# Allegro board temperature.brd
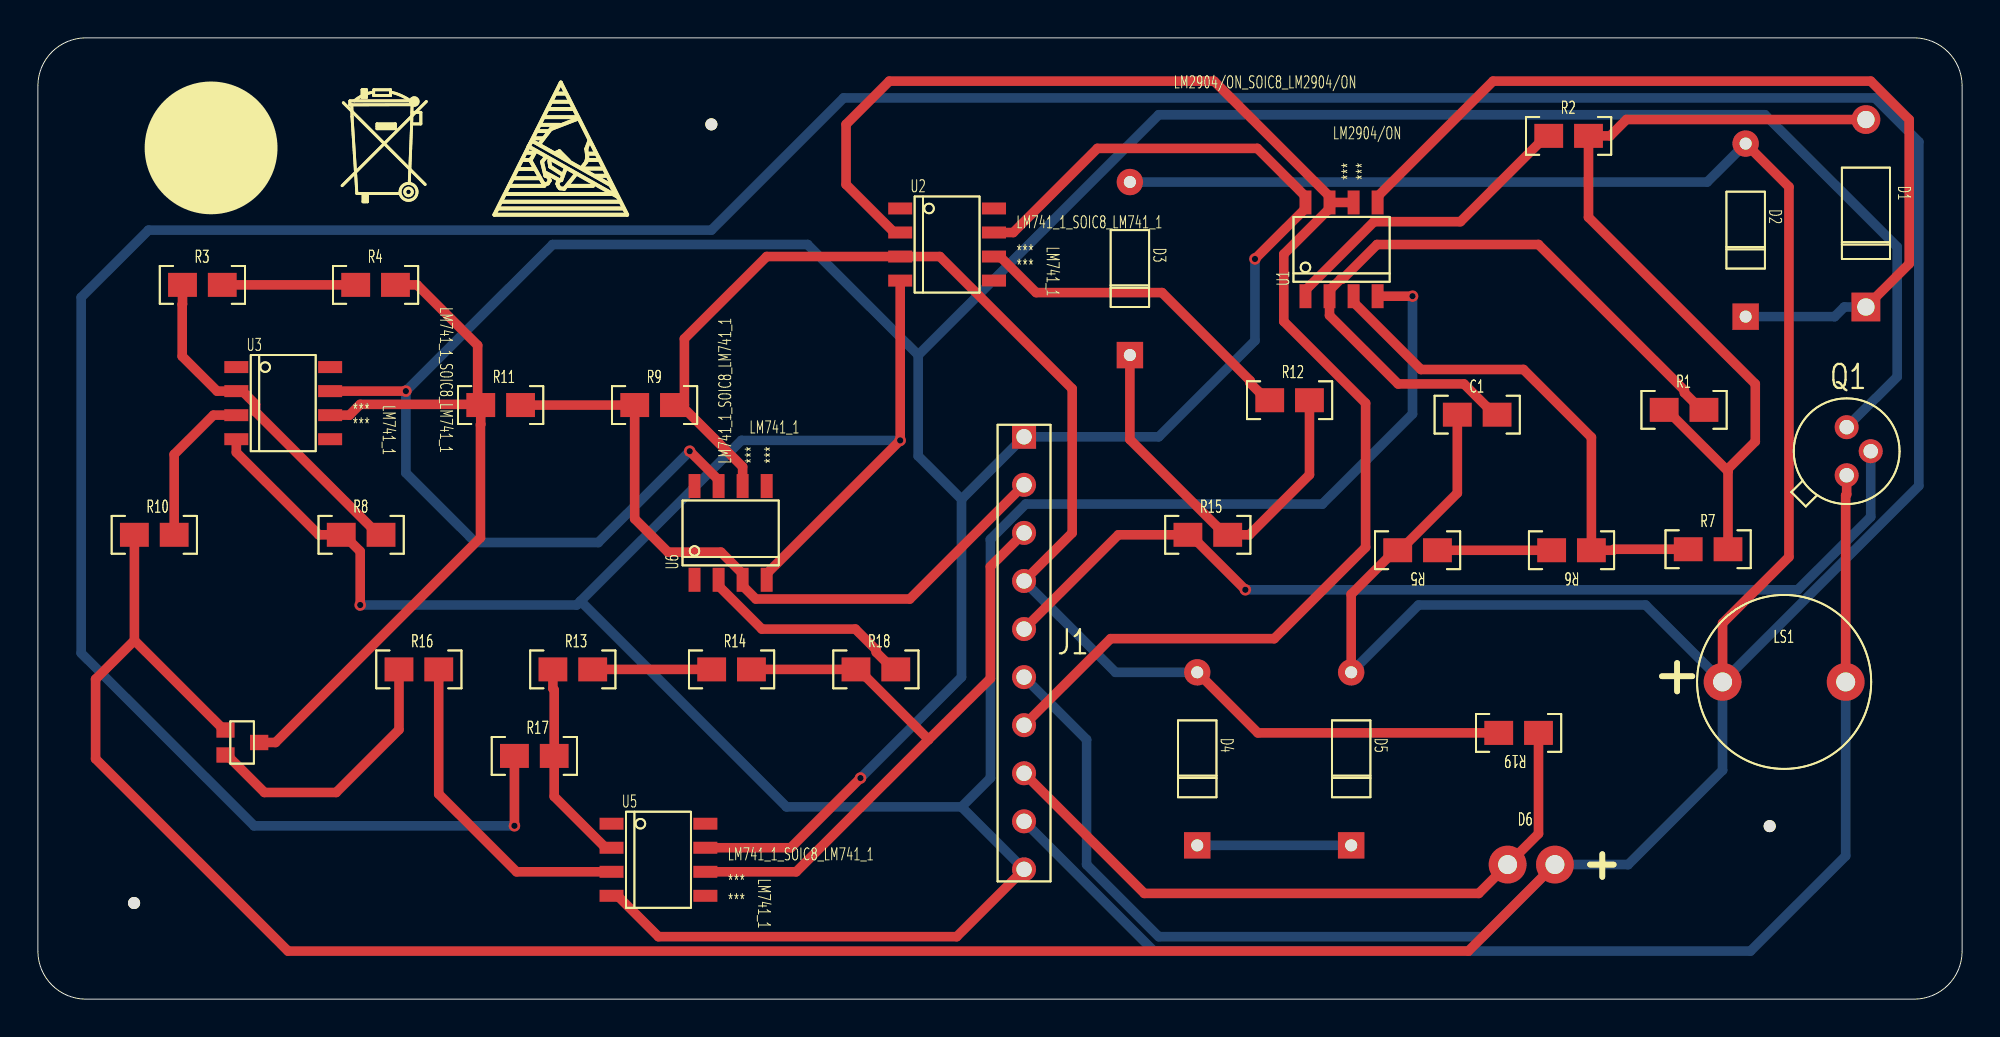
[diagram p0: board, top side]
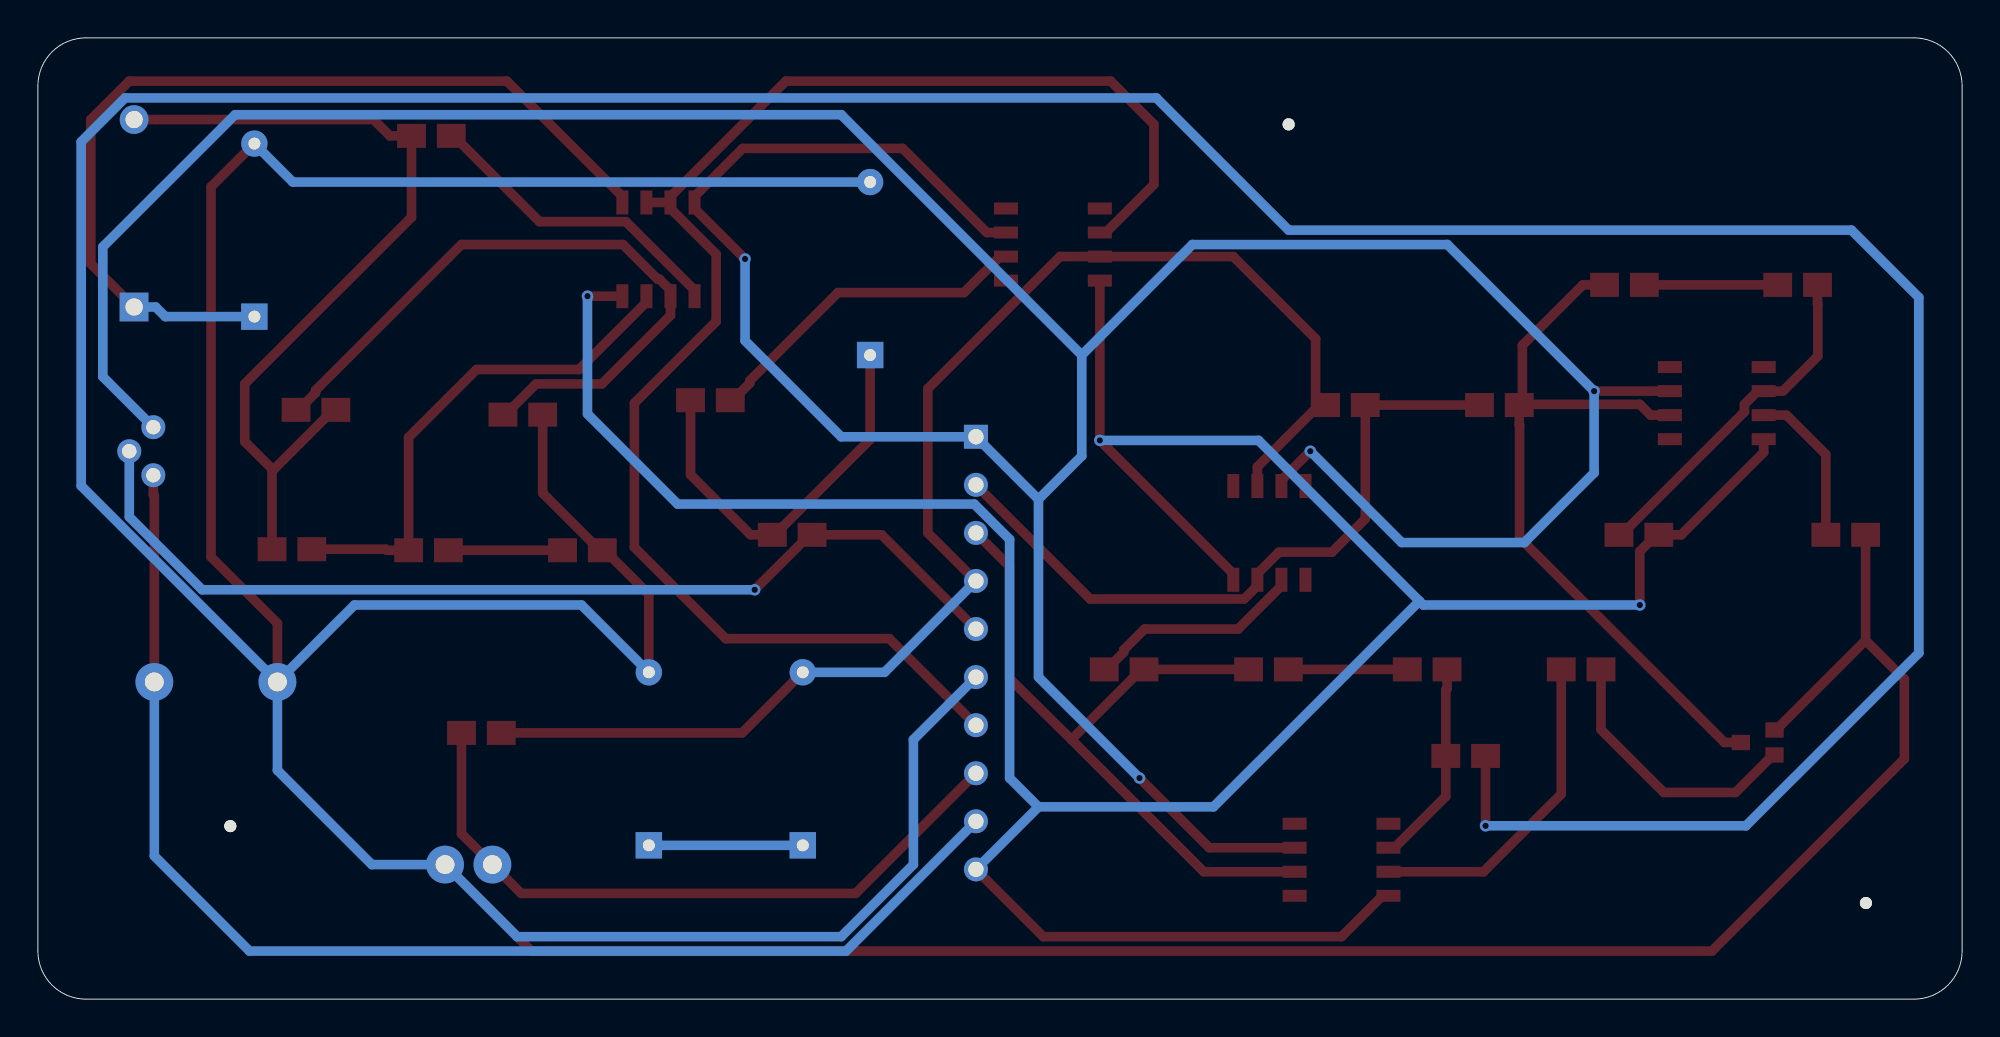
[diagram p1: board, bottom side, seen from below]

Outline 101.6 x 50.8 mm; copper layers: TOP, BOTTOM. Coordinates in mm from the lower left corner of the outline.
Outline path: 0,48.26 arc(0.74,50.06) 2.54,50.8 99.06,50.8 arc(100.86,50.06) 101.6,48.26 101.6,2.54 arc(100.86,0.74) 99.06,0 2.54,0 arc(0.74,0.74) 0,2.54 0,48.26

## Placement (name value [footprint] x y rotation side)
C1  0.1u  [0805]  75.95 30.99 0 top
D1  D1N5819/ON  [DO41-1]  96.52 36.58 0 top
D2  1n5231/ON  [DO35-1]  90.17 36.07 0 top
D3  1N4099  [DO35-1]  57.66 34.04 0 top
D4  1N4617  [DO35-1]  61.21 8.13 0 top
D5  1N4617  [DO35-1]  69.34 8.13 0 top
D6  LP_A676-TYP  [FG]  79.5 7.11 0 top
J1  HEADER 10  [SIP]  52.07 29.72 0 top
LS1  BUZZER  [FMQ]  92.2 16.76 0 top
NOREF  -  []  26.92 44.45 0 top
NOREF#2  -  [unnamed#2]  35.56 46.23 0 top
NOREF#3  -  [unnamed#2]  5.08 5.08 0 top
NOREF#4  -  []  9.65 45.21 0 top
NOREF#5  -  []  20.83 45.21 0 top
NOREF#6  -  [unnamed#2]  91.44 9.14 0 top
Q1  2N2222A  [TO18]  95.5 27.69 0 top
R1  4.7k  [0805]  86.87 31.24 0 top
R2  330  [0805]  80.77 45.72 0 top
R3  33k  [0805]  8.64 37.85 0 top
R4  2.4k  [0805]  17.78 37.85 0 top
R5  130k  [0805]  72.9 23.62 180 top
R6  9.1k  [0805]  81.03 23.62 180 top
R7  100k  [0805]  88.14 23.88 0 top
R8  100k  [0805]  17.02 24.64 0 top
R9  56k  [0805]  32.51 31.5 0 top
R10  100k  [0805]  6.1 24.64 0 top
R11  390  [0805]  24.38 31.5 0 top
R12  1.8k  [0805]  66.04 31.75 0 top
R13  30k  [0805]  28.19 17.53 0 top
R14  200  [0805]  36.58 17.53 0 top
R15  1.8k  [0805]  61.72 24.64 0 top
R16  100k  [0805]  20.07 17.53 0 top
R17  20k  [0805]  26.16 12.95 0 top
R18  10k  [0805]  44.2 17.53 0 top
R19  56  [0805]  78.23 13.97 180 top
U1  LM2904/ON  [SOIC8]  68.83 39.62 90 top
U2  LM741_1  [SOIC8]  48.01 39.88 0 top
U3  LM741_1  [SOIC8]  12.95 31.5 0 top
U4  TMP20  [SC70]  9.91 14.22 0 top
U5  LM741_1  [SOIC8]  32.77 7.37 0 top
U6  LM741_1  [SOIC8]  36.58 24.64 90 top

## Library data of the parts
C1 = C
D1 = D1N5819/ON_1
D2 = 1n5231/ON_0
D3 = 1N4099_0
D4 D5 = 1N4617_0
D6 = LP_A676-TYP
J1 = HEADER 10
LS1 = BUZZER
Q1 = 2N2222A
R1-R19 = R
U1 = LM2904/ON: Tolerance: ***; User Part Number: ***
U2 U3 U5 U6 = LM741_1: Tolerance: ***; User Part Number: ***
U4 = TMP20_0

## Footprints (pads in the part's own frame, mm; a bottom-side part is the same pattern mirrored in y, then rotated)
0805
  rect 1.524x1.27 smd: 1(-1,-0.1) 2(1.1,-0.1)
DO35-1
  round 1.397 hole 0.635: 1(0,9.144)
  rect 1.397x1.397 hole 0.635: 2(0,0)
DO41-1
  round 1.524 hole 0.914: 1(0,9.906)
  rect 1.524x1.524 hole 0.914: 2(0,0)
FG
  round 2 hole 1: 1(-1.9,0) 2(0.6,0)
FMQ
  round 2 hole 1: 1(-3.25,0) 2(3.25,0)
SC70
  rect 0.965x0.813 smd: 1(0,0) 2(0,-1.321) 3(1.778,-0.66)
SIP
  rect 1.27x1.27 hole 0.813: 1(0,0)
  round 1.27 hole 0.813: 2(0,-2.54) 3(0,-5.08) 4(0,-7.62) 5(0,-10.16) 6(0,-12.7) 7(0,-15.24) 8(0,-17.78) 9(0,-20.32) 10(0,-22.86)
SOIC8
  rect 1.27x0.635 smd: 1(-2.477,1.905) 2(-2.477,0.635) 3(-2.477,-0.635) 4(-2.477,-1.905) 5(2.477,-1.905) 6(2.477,-0.635) 7(2.477,0.635) 8(2.477,1.905)
TO18
  round 1.27 hole 0.762: 1(0,0) 2(1.27,1.27) 3(0,2.54)
unnamed#2
  round 0.635 hole 3.175 unplated: (0,0)

## Nets
+10V: J1.1 Q1.3(C) U1.8(V+) U2.7(V+) U3.7(V+) U5.7(V+) U6.7(V+)
-10V: J1.10 R8.1 U1.4(V-) U2.4(V-) U3.4(V-) U5.4(V-) U6.4(V-)
0: C1.1 D2.1 D3.1(A) D5.1(A) D6.2 J1.6 LS1.1(A) R5.2 R10.1 R17.1 U4.1(GND)
AC: J1.5 Q1.2(B) R15.1
BUZZER: J1.9 LS1.2(B) Q1.1(E)
DC: D4.1(A) J1.4 R9.2 R19.2 U2.3(IN+) U6.6(OUT)
LED: D6.1 J1.8 R19.1
REF: J1.2 R9.1 R11.2 U6.3(IN+)
SQUARE: J1.7 U1.6(-) U1.7(OUT) U2.2(IN-)
TEMP: J1.3 R14.2 R18.1 U5.6(OUT)
N41488: C1.2 R1.2 U1.2(-)
N41492: R6.1 R7.1 U1.3(+)
N41506: D1.1 R1.1 R2.2 R7.2
N41520: R2.1 U1.1(OUT)
N41530: D1.2 D2.2 U1.5(+)
N41862: R18.2 U6.2(IN-)
N42178: D3.2(K) R12.2 R15.2
N42252: R13.1 R17.2 U5.2(IN-)
N42450: R4.2 R11.1 U3.6(OUT) U4.3(V+)
N42584: R3.1 R8.2 U3.2(IN-)
N44906: D4.2(K) D5.2(K)
N50399: R16.2 U5.3(IN+)
N50887: R10.2 U3.3(IN+)
N51379: R16.1 U4.2(VOUT)
N58789: R5.1 R6.2
N59014: R3.2 R4.1
N59102: R13.2 R14.1
N421641: R12.1 U2.6(OUT)

Pads without a net: U2 1 5 8; U3 1 5 8; U5 1 5 8; U6 1 5 8

## Via types
v1: diameter 0.61, hole 0.33, TOP to BOTTOM, 17 vias

## Routing (per net, layer and track width the routed paths; a pad name or vN(x,y) marks a point on that pad's centre or on a via; arc(x,y) is an arc through that point)
+10V: length 214.7
  TOP w0.508: 35.24,8 39.75,8 v1(43.43,11.68) ; U2.7 51.5,40.51 55.94,44.96 64.39,44.96 66.93,42.42 66.93,41.78 v1(64.26,39.12) ; v1(34.42,28.96) 35.94,27.43 U6.7 ; U3.7 v1(19.43,32.13)
  BOTTOM w0.508: 46.48,34.04 59.18,46.74 91.19,46.74 98.17,39.75 98.17,32.89 Q1.3 ; 46.48,34.04 40.64,39.88 27.18,39.88 v1(19.43,32.13) 19.43,27.81 23.11,24.13 29.59,24.13 v1(34.42,28.96) ; 46.48,34.04 46.48,28.7 48.77,26.42 ; 48.77,26.42 48.77,17.02 v1(43.43,11.68) ; 48.77,26.42 J1.1 59.18,29.72 64.26,34.8 v1(64.26,39.12)
-10V: length 164.4
  TOP w0.508: U3.4 10.48,28.89 14.83,24.54 R8.1 16.15,24.54 17.02,23.66 v1(17.02,20.83) ; J1.10 48.51,3.3 32.77,3.3 30.61,5.46 U5.4 ; U2.4 v1(45.53,29.53) 38.48,22.48 U6.4 ; U1.4 v1(72.58,37.15)
  BOTTOM w0.508: v1(45.53,29.53) 37.15,29.53 28.65,21.03 ; 28.65,21.03 28.45,20.83 v1(17.02,20.83) ; 28.65,21.03 39.53,10.16 48.77,10.16 ; 48.77,10.16 J1.10 ; 48.77,10.16 50.29,11.68 50.29,24.3 52.16,26.16 67.82,26.16 72.58,30.92 v1(72.58,37.15)
0: length 444.7
  TOP w0.508: v1(88.95,16.76) 88.95,19.86 92.46,23.37 92.46,42.93 v1(90.17,45.21) ; R10.1 5.1,18.96 ; 5.1,18.96 3.05,16.91 3.05,12.7 13.21,2.54 75.53,2.54 D6.2 ; 5.1,18.96 9.83,14.22 U4.1 ; D5.1 69.34,21.39 71.67,23.72 R5.2 71.92,23.72 74.95,26.74 C1.1 ; R17.1 v1(25.16,9.16)
  BOTTOM w0.508: v1(57.66,43.18) 88.14,43.18 v1(90.17,45.21) ; v1(88.95,16.76) 84.89,20.83 72.9,20.83 D5.1 ; v1(88.95,16.76) 88.95,12.1 83.97,7.11 D6.2 76.29,3.3 59.18,3.3 55.37,7.11 55.37,13.72 J1.6 ; v1(88.95,16.76) 99.31,27.13 99.31,45.3 96.99,47.62 42.54,47.62 35.56,40.64 5.84,40.64 2.29,37.08 2.29,18.29 11.41,9.16 v1(25.16,9.16)
AC: length 53
  TOP w0.508: J1.5 57.05,24.54 R15.1 60.85,24.54 v1(63.75,21.63)
  BOTTOM w0.508: v1(63.75,21.63) 92.92,21.63 96.77,25.48 Q1.2
BUZZER: length 68.4
  TOP w0.508: Q1.1 95.5,26.67 95.45,26.62 v1(95.45,16.76)
  BOTTOM w0.508: v1(95.45,16.76) 95.45,7.57 90.42,2.54 58.93,2.54 J1.9
DC: length 74.4
  TOP w0.508: U6.6 37.21,28.13 33.95,31.4 ; R19.2 64.42,14.07 D4.1 ; J1.4 54.61,24.64 54.61,32.26 47.62,39.24 U2.3 38.48,39.24 34.14,34.9 34.14,31.4 33.95,31.4 ; 33.95,31.4 R9.2
  BOTTOM w0.508: J1.4 56.9,17.27 D4.1
LED: length 36.4
  TOP w0.508: J1.8 58.42,5.59 76.08,5.59 D6.1 79.23,8.74 R19.1
REF: length 37.2
  TOP w0.508: R11.2 R9.1 31.51,25.38 33.27,23.62 36.07,23.62 37.21,22.48 U6.3 37.21,21.84 37.91,21.15 46.04,21.15 J1.2
SQUARE: length 80.6
  TOP w0.508: v1(52.07,14.48) 56.64,19.05 65.28,19.05 70.1,23.88 70.1,31.5 65.79,35.81 65.79,39.37 68.2,41.78 68.2,42.1 ; 68.2,42.1 68.2,42.42 62.1,48.51 44.96,48.51 42.67,46.23 42.67,43.05 45.21,40.51 U2.2 ; 68.2,42.1 U1.6
TEMP: length 38.6
  TOP w0.508: 47.02,13.72 40.04,6.73 U5.6 ; 47.02,13.72 50.29,16.94 50.29,22.86 J1.3 ; 47.02,13.72 47.02,13.72 43.32,17.43 R18.1 R14.2
N41488: length 36.8
  TOP w0.508: R1.2 87.84,31.14 86.94,32.05 86.94,32.17 79.23,39.88 70.71,39.88 68.88,38.05 68.79,38.05 68.2,37.46 68.2,36.13 71.82,32.51 75.29,32.51 76.92,30.89 C1.2
N41492: length 26.9
  TOP w0.508: R7.1 83.22,23.78 83.17,23.72 R6.1 82.03,29.69 78.44,33.27 73.03,33.27 69.47,36.83 U1.3
N41506: length 45.8
  TOP w0.508: 89.24,27.9 86,31.14 R1.1 ; 89.24,27.9 89.24,28.02 90.68,29.46 90.68,32.51 81.87,41.32 R2.2 83.02,45.62 83.88,46.48 D1.1 ; 89.24,27.9 R7.2
N41520: length 16.5
  TOP w0.508: R2.1 79.65,45.62 75.11,41.08 70.55,41.08 66.93,37.46 66.93,37.15
N41530: length 49.2
  TOP w0.508: U1.5 70.74,42.42 76.83,48.51 96.77,48.51 98.81,46.48 98.81,38.86 D1.2
  BOTTOM w0.508: D2.2 94.87,36.07 95.38,36.58 D1.2
N41862: length 11.6
  TOP w0.508: R18.2 45.17,17.43 44.26,18.33 44.26,18.46 43.16,19.56 38.23,19.56 35.94,21.84 U6.2
N42178: length 21.3
  TOP w0.508: D3.2 57.66,29.57 62.7,24.54 R15.2 63.97,24.54 67.14,27.71 R12.2
N42252: length 10.9
  TOP w0.508: 30.29,8 29.97,8 27.26,10.71 R17.2 27.26,16.34 27.19,16.41 R13.1
N42450: length 40.2
  TOP w0.508: 23.22,31.43 23.26,31.4 R11.1 23.38,30.38 23.37,30.36 23.37,24.38 12.55,13.56 U4.3 ; 23.22,31.43 23.22,34.55 20.02,37.75 R4.2 ; 23.22,31.43 17.02,31.43 16.45,30.86 U3.6
N42584: length 18.4
  TOP w0.508: R3.1 7.64,36.73 7.62,36.71 7.62,33.97 9.46,32.13 U3.2 10.79,32.13 11.49,31.43 11.49,31.04 17.99,24.54 R8.2
N44906: length 8.1
  BOTTOM w0.508: D4.2 D5.2
N50399: length 17.4
  TOP w0.508: R16.2 21.17,10.84 25.27,6.73 U5.3
N50887: length 8.4
  TOP w0.508: U3.3 9.27,30.86 7.2,28.79 R10.2
N51379: length 14.5
  TOP w0.508: R16.1 19.07,14.24 15.75,10.92 11.96,10.92 9.98,12.9 U4.2
N58789: length 6
  TOP w0.508: R6.2 R5.1
N59014: length 7
  TOP w0.508: R3.2 R4.1
N59102: length 6.3
  TOP w0.508: R14.1 R13.2
N421641: length 17.8
  TOP w0.508: U2.6 50.8,39.24 52.7,37.34 59.35,37.34 64.01,32.68 64.01,32.55 64.91,31.65 R12.1
